# Altium PCB Copy of CANable.PcbDoc
Units mil, origin at the board's own origin, x right, y up, seen from the top; angles counter-clockwise.
Board outline 1380 x 996.39 mil, 2 copper layers (Top Layer, Bottom Layer); 29 components, 20 nets, 127 pads, 14 vias.
Unrouted connection lines stored in the file: 4.
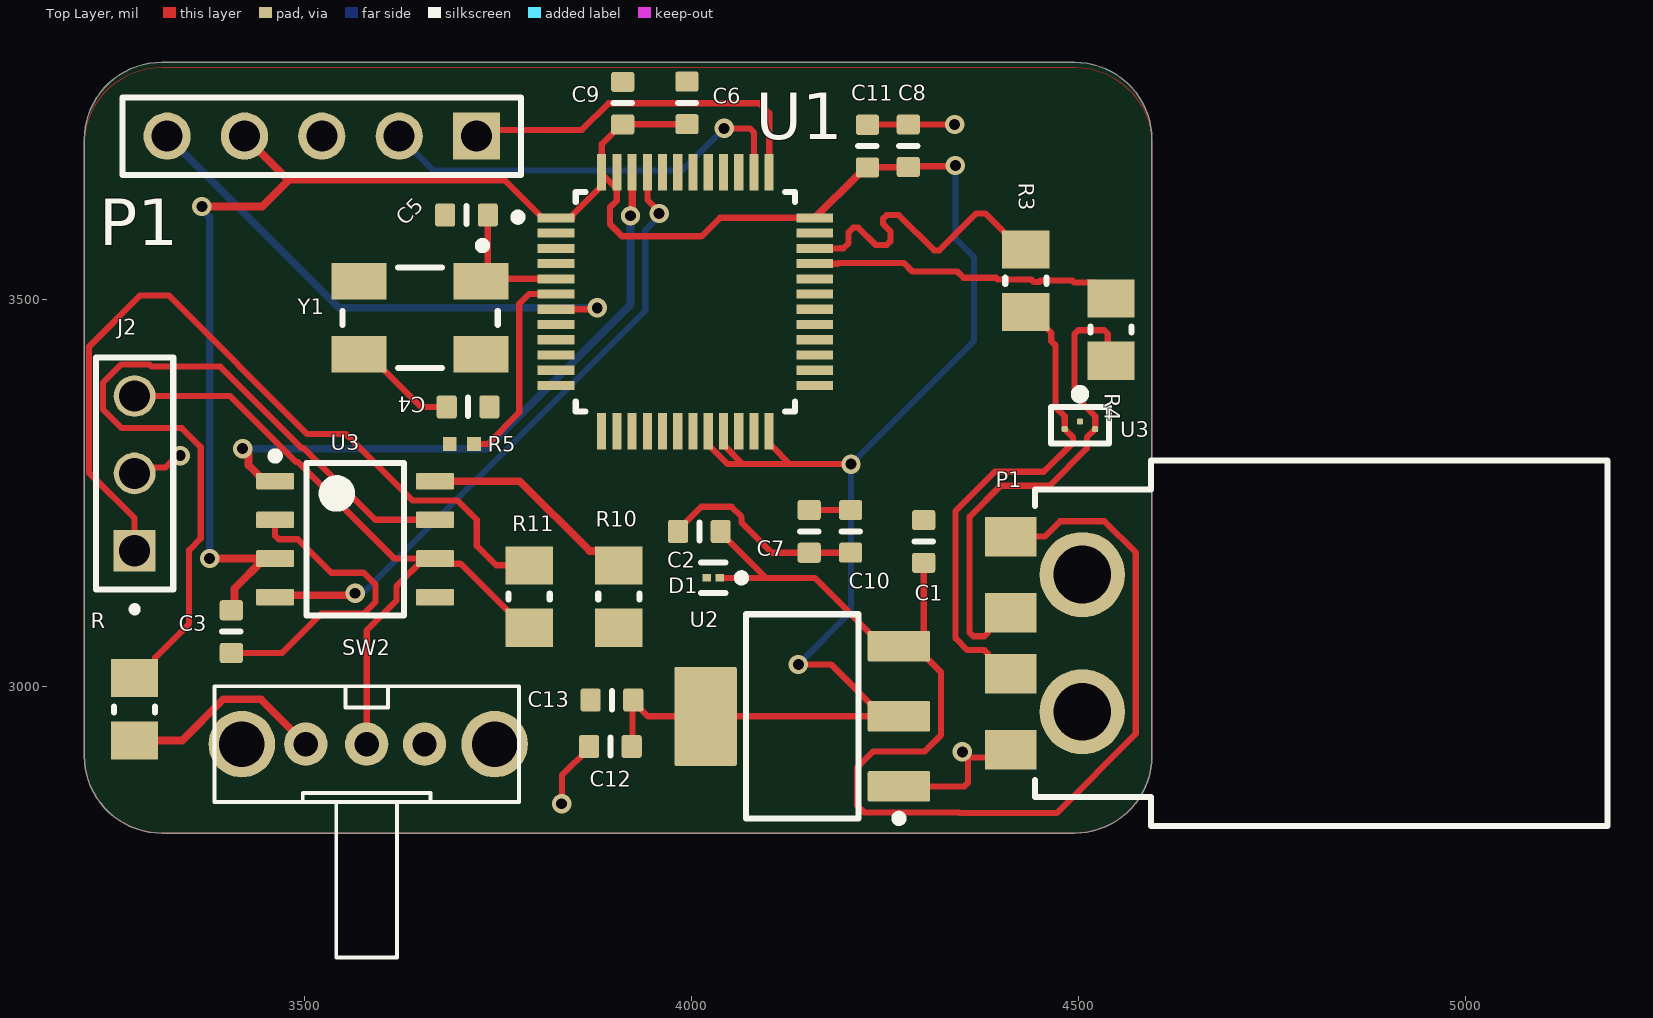
[diagram p0: Top Layer view]
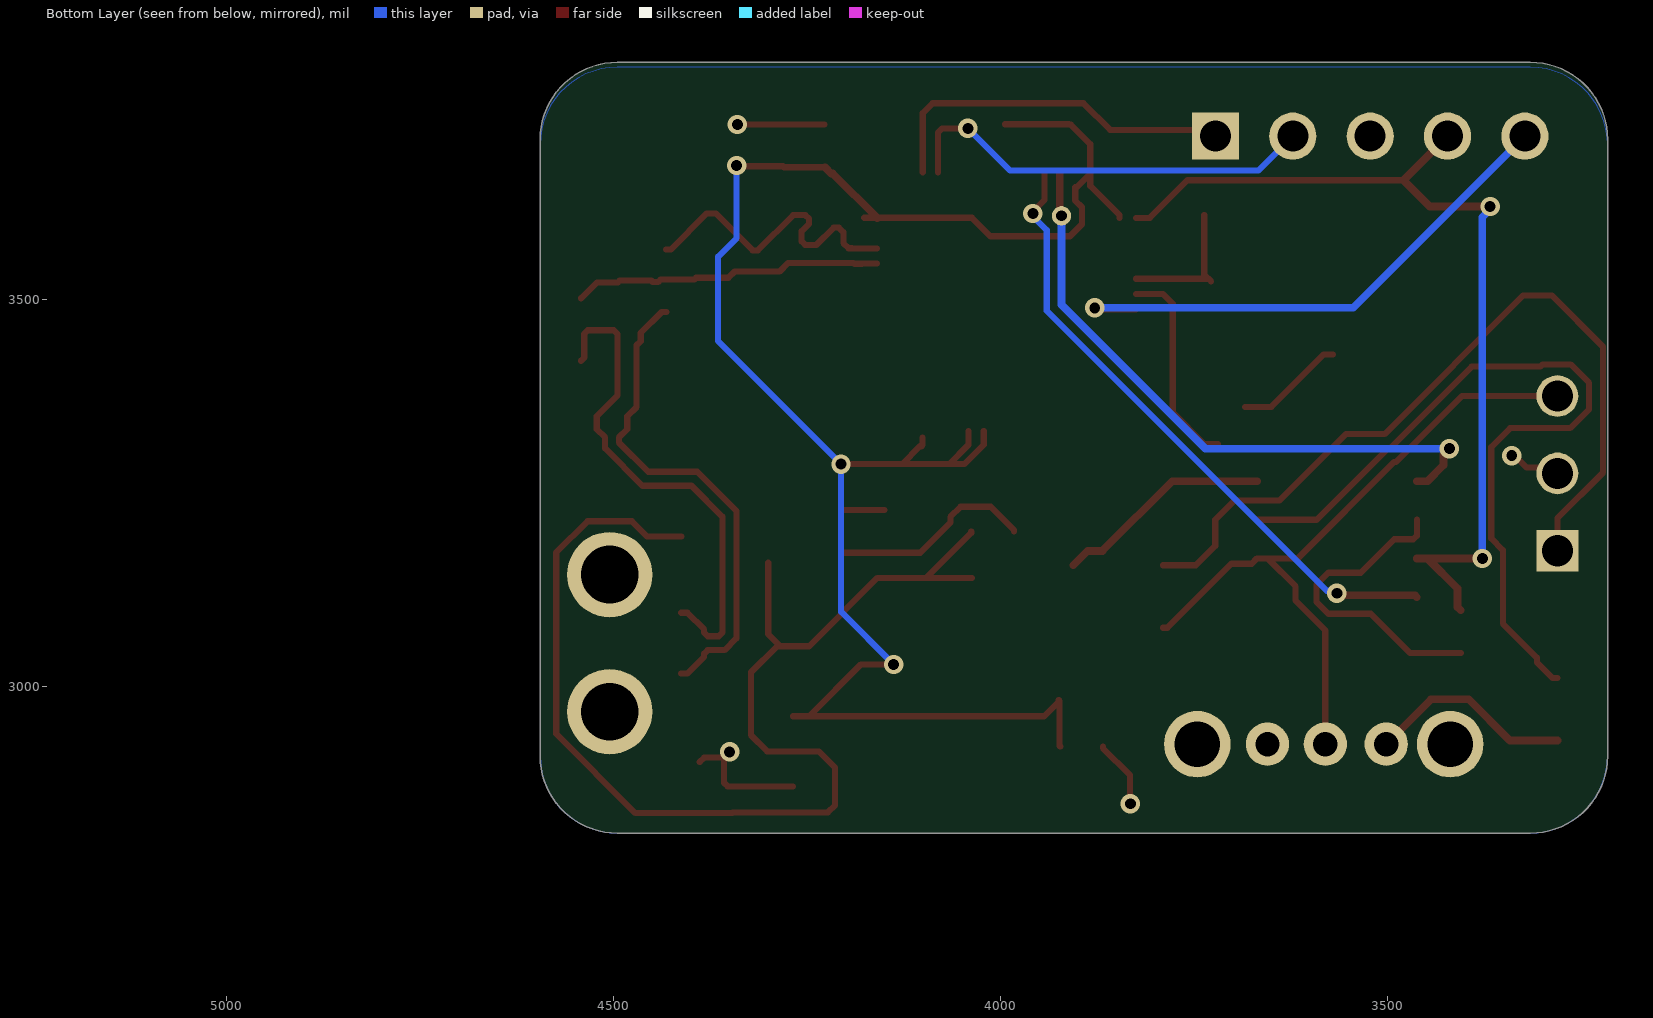
[diagram p1: Bottom Layer view, seen from below]

## Layer stack, top to bottom
Top Solder: solder mask 0.4, Solder Resist, Dk 3.5
Top Layer: signal copper 1.4
Dielectric 1: dielectric 12.6, FR-4, Dk 4.8
Bottom Layer: signal copper 1.4
Bottom Solder: solder mask 0.4, Solder Resist, Dk 3.5

## Board outline
3215,2910 3215,3706.39 cw(c3315,3706.39) 3315,3806.39 4495,3806.39 cw(c4495,3706.39) 4595,3706.39 4595,2910 cw(c4495,2910) 4495,2810 3315,2810 cw(c3315,2910)

## Design rules (kind name [scope] priority, off if disabled: settings)
Clearance [All] p1: gap=10 ignorepadtopadclearanceinfootprint=FALSE
DiffPairsRouting [All] p1: maxlimit=10 minlimit=10 mostfreqgap=10 toplayer_minwidth=8 toplayer_maxwidth=12 toplayer_prefwidth=8 bottomlayer_minwidth=8 bottomlayer_maxwidth=12 bottomlayer_prefwidth=8 maxuncoupledlength=500
HoleSize [All] p1: absolutevalues=TRUE maxlimit=50 minlimit=1 maxpercent=80.000 minpercent=20.000
PolygonConnect [All] p1: connectstyle=Relief reliefconductorwidth=10 reliefentries=4 polygonreliefangle="90 Angle" airgapwidth=10
RoutingVias [All] p1: holewidth=28 width=50 viastyle="Through Hole" minholewidth=28 minwidth=50 maxholewidth=28 maxwidth=50
SolderMaskExpansion [All] p1: expansion=4 istentingtop=FALSE
SupplyNets "Schematic Supply Nets_2" [InNet('VBUS')] p1: voltage=0.000
SupplyNets "Schematic Supply Nets_1" [InNet('+3.3')] p2: voltage=0.000
SupplyNets "Schematic Supply Nets" [InNet('GND')] p3: voltage=0.000
Width [All] p1: maxlimit=10 minlimit=8 preferedwidth=8 minimp=50.000000 maximp=50.000000 favimp=50.000000 checkconnectedcopper=TRUE
28 further rules are at their usual default settings.

## Classes and differential pairs
component class U_Voltage_Regulator: C1 C2 C12 C13 U2
component class U_Microcontroller: C4 C5 C6 C7 C8 C9 C10 C11 R3 R4 R5 U1 Y1
component class U_Input_Output: D1 D2 J2 P1 R11 U3
component class U_CAN_Transceiver: C3 R R10 SW2 U3
differential pair D_USB: +D_USB_P -D_USB_N

## Components (designator, comment, footprint, x,y, rotation, side; value= is the part's Value field where it differs from the comment)
C1 "0.1uF" CAPC0603(1608)100_L 4300,3187 r90 top
C2 "10uF" CAPC0603(1608)100_L 4010,3200 r180 top
C3 "100nF" CAPC0603(1608)100_L 3405,3070.56 r270 top
C4 "22pF" CAPC0603(1608)100_L 3711,3361 r0 top
C5 "22pF" CAPC0603(1608)100_L 3709,3609 r180 top
C6 "100nF" CAPC0603(1608)100_L 3994,3754 r90 top
C7 "100nF" CAPC0603(1608)100_L 4152,3200 r270 top
C8 "100nF" CAPC0603(1608)100_L 4280.09,3698.49 r90 top
C9 "100nF" CAPC0603(1608)100_L 3911,3753.56 r90 top
C10 "100nF" CAPC0603(1608)100_L 4205.58,3200.1 r270 top
C11 "100nF" CAPC0603(1608)100_L 4227.23,3698.09 r90 top
C12 "10uF" CAPC0603(1608)100_L 3895,2922 r180 top
C13 "0.1uF" CAPC0603(1608)100_L 3897,2982 r180 top
D1 "ESD441DPLR" FP-DPL0002A-MFG 4028,3140 r180 top
J2 "CAN" "3 pin 2.54mm header-Footprint-1" 3330,3125 r90 top
P1 "TSW-105-05-L-S" SMTC-TSW-105-05-X-S 3722,3711 r180 top
P1 "629004113921" 629004113921 4814.06,3055.58 r90 top
R "RES 0805" RESC2013X50X30ML20T20 3280,2970 r90 top
R3 "RES 0805" RESC2013X50X30ML20T20 4432,3524 r90 top
R4 "RES 0805" RESC2013X50X30ML20T20 4542,3461 r90 top
R5 "1k" RESC1005X40X25LL05T05 3703,3313 r180 top
R10 "RES 0805" RESC2013X50X30ML20T20 3905.85,3115.87 r270 top
R11 "RES 0805" RESC2013X50X30ML20T20 3790,3115.87 r90 top
SW2 "OS102011MA1Q" OS102011MA1Q 3580,2925 r0 top
U1 "STM32G431CBT6" FP-LQFP48-5B-MFG 3992,3497 r0 top
U2 "REG1117-3.3" DCY0004A_M 4143,2961 r180 top
U3 "ESD122DMYR" FP-DMY0003A-MFG 4502,3337.08 r270 top
U3 "SN65HVD231QDG4" D0008A_L 3565,3190 r0 top
Y1 "ABM3B-8.000MHZ-B2-T" FP-ABM3B-MFG 3649,3476 r180 top

## Footprints (in the part's own frame and the unit in brackets; to place one, negate y for a bottom-side part, rotate by r counter-clockwise, add the part's x,y. Pads: shape width x height; smd on the part's side, far side on the other; paste and mask are expansions set on the pad)
"3 pin 2.54mm header-Footprint-1" [mm]
  rect 1.37x1.37 hole 1.02: 1(1.27,1.27)
  round 1.37 hole 1.02: 2(3.81,1.27) 3(6.35,1.27)
  silkscreen extent -0.75,0 7.62,2.54
629004113921 [mm] "USB 2.0 Plug Type A SMT with Clip"
  rect 1.3x1.7 smd: 1(3.5,10.2) 2(1,10.2) 3(-1,10.2) 4(-3.5,10.2)
  round 2.8 hole 1.9: Shell(-2.25,7.85) Shell(2.25,7.85)
  silkscreen extent -6,-9.4 6,9.4, body extent -6,-9.4 6,10.4, height 2.25
CAPC0603(1608)100_L [mm] "Chip Capacitor, Body 1.6x0.8mm, Height 1.0mm, IPC High Density"
  rrect25% 0.66x0.76 smd: 1(-0.7,0) 2(0.7,0)
  silkscreen extent 0,-0.3 0,0.3, body extent -0.8,-0.4 0.8,0.4, height 0.95
D0008A_L [mm] "SOIC, 8-Leads, Body 5x4mm, Pitch 1.27mm, IPC High Density"
  rrect18% 1.25x0.55 smd: 1(-2.625,1.905) 2(-2.625,0.635) 3(-2.625,-0.635) 4(-2.625,-1.905) 5(2.625,-1.905) 6(2.625,-0.635) 7(2.625,0.635) 8(2.625,1.905)
  silkscreen extent -2.75,-2.5 1.6,2.85, body extent -3,-2.45 3,2.45, height 1.63
DCY0004A_M [mm] "SOT223, 4-Leads, Body 6.7x3.7mm, Pitch 2.3mm, IPC Low Density"
  rrect10% 2.05x1 smd: 1(-3.175,2.3) 2(-3.175,0) 3(-3.175,-2.3)
  rrect5% 2.05x3.25 smd: 4(3.175,0)
  silkscreen extent -3.3,-3.35 1.85,3.47
FP-ABM3B-MFG [mm]
  rect 1.8x1.2 smd paste+0 mask+0: 1(-2,-1.2) 2(2,-1.2) 3(2,1.2) 4(-2,1.2)
  silkscreen extent -2.55,-2.5 2.55,1.65, body extent -3,-1.9 3,1.9, height 0.25
FP-DMY0003A-MFG [mm]
  rrect50% 0.2x0.2 smd paste-1000 mask-1000: 1(-0.125,0) 2(0.125,-0.5) 3(0.125,0.5)
  silkscreen extent -1.17,-0.95 0.6,0.95, body extent -0.45,-0.8 0.45,0.8, height 0.25
FP-DPL0002A-MFG [mm]
  rect 0.28x0.25 smd paste+0 mask+0: 1(-0.22,0) 2(0.22,0)
  silkscreen extent -1.05,-0.5 0.4,0.5, body extent -0.46,-0.28 0.46,0.28, height 0.25
FP-LQFP48-5B-MFG [mm]
  rect 1.2x0.3 smd paste+0 mask+0: 1(-4.25,2.75) 2(-4.25,2.25) 3(-4.25,1.75) 4(-4.25,1.25) 5(-4.25,0.75) 6(-4.25,0.25) 7(-4.25,-0.25) 8(-4.25,-0.75) 9(-4.25,-1.25) 10(-4.25,-1.75) 11(-4.25,-2.25) 12(-4.25,-2.75) 25(4.25,-2.75) 26(4.25,-2.25) 27(4.25,-1.75) 28(4.25,-1.25) 29(4.25,-0.75) 30(4.25,-0.25) 31(4.25,0.25) 32(4.25,0.75) 33(4.25,1.25) 34(4.25,1.75) 35(4.25,2.25) 36(4.25,2.75)
  rect 0.3x1.2 smd paste+0 mask+0: 13(-2.75,-4.25) 14(-2.25,-4.25) 15(-1.75,-4.25) 16(-1.25,-4.25) 17(-0.75,-4.25) 18(-0.25,-4.25) 19(0.25,-4.25) 20(0.75,-4.25) 21(1.25,-4.25) 22(1.75,-4.25) 23(2.25,-4.25) 24(2.75,-4.25) 37(2.75,4.25) 38(2.25,4.25) 39(1.75,4.25) 40(1.25,4.25) 41(0.75,4.25) 42(0.25,4.25) 43(-0.25,4.25) 44(-0.75,4.25) 45(-1.25,4.25) 46(-1.75,4.25) 47(-2.25,4.25) 48(-2.75,4.25)
  silkscreen extent -5.62,-3.6 3.6,3.6, body extent -4.95,-4.95 4.95,4.95, height 0.25
OS102011MA1Q [mil]
  round 56 hole 31.5: 1(-78.74,0) 2(0,0) 3(74.8,0)
  round 86 hole 59.06: MT1(-161.42,0) MT2(165.35,0)
  silkscreen extent -197,-276 197,75, body extent -170,-244 170,86, height 185
RESC1005X40X25LL05T05 [mm] "Chip Resistor, 2-Leads, Body 1.05x0.55mm, IPC High Density"
  rect 0.45x0.45 smd: 1(-0.4,0) 2(0.4,0)
  body extent -0.53,-0.28 0.53,0.28, height 0.4
RESC2013X50X30ML20T20 [mm] "Chip Resistor, 2-Leads, Body 2.00x1.25mm, IPC Low Density"
  rect 1.25x1.55 smd: 1(-1.025,0) 2(1.025,0)
  silkscreen extent -0.1,-0.67 0.1,0.67, body extent -1.1,-0.72 1.1,0.72, height 0.5
SMTC-TSW-105-05-X-S [mm] ".025 SQ Post Terminal Strip Assembly, 1x5 Pins, Vertical, 2.54mm Pitch, Male"
  rect 1.55x1.55 hole 1.02: 1(0,0)
  round 1.55 hole 1.02: 2(2.54,0) 3(5.08,0) 4(7.62,0) 5(10.16,0)
  silkscreen extent -1.46,-1.27 11.62,1.27, body extent -1.27,-1.27 11.43,1.27, height 5.21

## Part data
C1 C2 C4 C5 C6 C7 C8 C9 C10 C11 C12 C13: library part CMP-001-00083-4, "GENERIC CAPACITOR 0805 or 0603(1608)"
C3: library part CMP-001-00083-4
D1: library part CMP-00370-140306675-1, "ESD441DPLR 1-pF, 5.5-V, 30-KV ESD protection device in 0201 package 2-X2SON -40 to 125", Ambient Temperature Range High=150°C, Breakdown Voltage=6V, Capacitance=1pF, Clamping Voltage=3.8V, Manufacturer Lifecycle Status=ACTIVE, Max Operating Temperature=125°C, Min Operating Temperature=-40°C, Peak Pulse Current=6A, Peak Pulse Power=45W, Reverse Standoff Voltage=5.5V, Direction=Unidirectional, Height=320µm, Length=600µm, Lifecycle Status=Production, NexarPartId=140306675, Number of Channels=1, Number of Pins=2, Thickness=300µm, Width=300µm
J2: library part CMP-002-00074-2, "3 pin header for jumpers connectors 2.54mm pitch."
P1: library part CMP-1024-00366-1, "0.025\" SQ Post Header, Through-hole, Vertical, -55 to 125 degC, 2.54 mm Pitch, 5-Pin, Male, RoHS", Manufacturer=Samtec, Temperature Range="-55 to 125 degC", ComponentLink1Description="Manufacturer URL", ComponentLink1URL=http://www.samtec.com, ComponentLink2Description=Datasheet, ComponentLink2URL=http://www.samtec.com/documents/webfiles/pdf/TSW_TH.PDF, ComponentLink3Description="Package Specification", ComponentLink3URL=http://www.samtec.com/documents/webfiles/cpdf/TSW-XXX-XX-XXX-X-XX-XXX-MKT.pdf, DatasheetVersion=F-214, Mounting Technology=Through-hole, Orientation=Vertical, PackageDescription=".025[0.64] SQ. Post Terminal Strip Assembly", PackageReference=TSW-105-05-X-S, PackageVersion="DM, 8/1988", PartNumber=TSW-105-05-L-S, Pitch="2.54 mm", RoHS=True
P1: library part CMP-1502-03242-2, Contact Resistance=20mΩ, Current Rating=1.5A, Insulation Resistance=1GΩ, Max Operating Temperature=105°C, Min Operating Temperature=-40°C, Operating Supply Voltage=30V, Connector Type=USB, Contact Plating=Gold, Features=Shielded, Gender=Male, Lead Free="Lead Free", Length=18.8mm, Mount="Horizontal, Surface Mount", NexarPartId=19991169, Number of Contacts=4, Number of Pins=4, Orientation=Horizontal, REACH SVHC=Unknown, RoHS=Compliant, Termination=SMD/SMT, USB Standard="USB 2.0"
R R3 R4 R10 R11: library part CMP-009-00177-4, "Surface Mount 0805 Resistor"
R5: library part CMP-2000-07451-1, "Chip Resistor, 0 Ohm, 0.1 W, -55 to 155 degC, 0402 (1005 Metric), RoHS, Tape and Reel", Case Code (Imperial)=0402, Case Code (Metric)=1005, Manufacturer=Panasonic, Max Operating Temperature=155degC, Max Power Dissipation=100mW, Min Operating Temperature=-55degC, Package Description="2-Pin Surface Mount Device, Body 1 x 0.5 mm", Package Quantity=1, Package Reference=402, Resistance=0mOhm, Temperature Coefficient=600ppm/��C, Tolerance=5%, Voltage Rating=50V, Case/Package=0402, Composition=ThickFilm, Contact Plating=Tin, Datasheet URL=https://industrial.panasonic.com/cdbs/www-data/pdf/RDA0000/AOA0000C301.pdf, Datasheet Version=03/2015, Depth=0.5mm, Height=0.35mm, Lead Free=LeadFree, Length=1mm, Manufacturer URL=http://www.panasonic.com/, Military Standard=Not, Mount=SurfaceMount, Mounting Technology=SurfaceMount, Number of Terminations=2, Packaging=TapeandReel, Power Rating=100mW, Radiation Hardening=No, REACH SVHC=NoSVHC, RoHSCompliant=True, Termination=SMD/SMT, Voltage Rating (DC)=50V, Width=0.02inch
SW2: library part CMP-011-00009-1, "Slide Switch SPDT Through Hole, Right Angle", Case/Package=None, Check_prices=https://www.snapeda.com/parts/OS102011MA1Q/C%2526K/view-part/?ref=eda, Component Type=Standard, Design Item ID=OS102011MA1Q, MF=C&K, MP=OS102011MA1Q, Pins=5, SnapEDA_Link=https://www.snapeda.com/parts/OS102011MA1Q/C%2526K/view-part/?ref=snap, Source=OS102011MA1Q.SchLib
U1: library part CMP-12105-000030-1, "MAINSTREAM ARM CORTEX-M4+ MCU 17", Ambient Temperature Range High=+85°C, Ambient Temperature Range Low=-40°C, Frequency=170MHz, Manufacturer=STMicroelectronics, Max Junction Temp=+105°C, Max Supply Voltage=3.6V, Min Supply Voltage=1.62V, Package=LQFP48-5B, Temperature="-40°C to +85°C", Automotive=No, Category=IC, ComponentLink2Description=Datasheet, ComponentLink2URL=https://www.st.com/resource/en/datasheet/stm32g431cb.pdf, Core Architecture="Arm Cortex-M4", Data Bus Width=32bits, Device Class L1="Integrated Circuits (ICs)", Device Class L2="Embedded Processors and Controllers", Device Class L3=Microcontrollers, Digikey Description="MAINSTREAM ARM CORTEX-M4+ MCU 17", Height=1.6mm, Interface=I2C,SPI,UART,USART,CAN,USB,LIN,IrDA,I2S, Lead Free=Yes, Manufacturer Part Number=STM32G431CBT6, Memory Size=128KBytes, Memory Type=FLASH, Number of A/D Converters=1, Number of ADC Channels=17, Number Of Cores=1, Number of I2C Channels=3, Number of I/Os=38, Number of PWM Channels=31, Number of SPI Channels=3, Number of Timers/Counters=14, Number of UART Channels=4, Number Of Usb Channels=1, Octopart=https://octopart.com/stm32g431cbt6-stmicroelectronics-98835224, RAM Size=32KBytes, RoHS=TRUE, Standoff Height=0.05mm, Temperature Range High=+85°C, Temperature Range Low=-40°C
U2: library part CMP-019-00049-4, "LDO Regulator Pos 3.3V 0.8A 4-Pin(3+Tab) SOT-223 Rail"
U3: library part CMP-04985-000020-1, "TVS DIODE 3.6V 8.4V 3X2SON", Clamping Voltage=8.4V, Max Operating Temperature=125°C, Min Breakdown Voltage=5.1V, Min Operating Temperature=-40°C, Peak Pulse Current=2.5A, Peak Pulse Power=20W, Power Line Protection=No, Resistor Type=Zener, Reverse Standoff Voltage=3.6V, Interface=USB, Mount="Surface Mount", Number of Bidirectional Channels=2, Number of Channels=2, Number of Pins=3, Packaging="Tape and Reel", RoHS Compliant=Yes
U3: library part CMP-015-00013-2, "3.3-V CAN Transceiver with Sleep Mode 8-SOIC -40 to 125"
Y1: library part CMP-1688-00002-2, "Crystal 8MHz ±20ppm 18pF SMD-4 5mm x 3.2mm", Case/Package=CSMD, ESR (Equivalent Series Resistance)=200R, Frequency=8MHz, Frequency Stability=50ppm, Frequency Tolerance=20ppm, Load Capacitance=18pF, Max Operating Temperature=70°C, Min Operating Temperature=-20°C, Operating Frequency="8 MHz", Package Quantity=1000, Resistor Type=Ceramic, Depth=3.2mm, Height=0.043inch, Lead Free="Lead Free", Length=5mm, Mount="Surface Mount", Number of Pins=4, Packaging="Tape and Reel", Series=ABM3B, Series Resistance=200R, Termination=SMD/SMT, Tolerance=20ppm, Width=0.126inch

## Free pads (board coordinates)
  round 25 hole 14: 2(3921,3608)

## Via types
v1: diameter 25, hole 14, Top Layer to Bottom Layer, 14 vias

## Nets (pads, with @x,y where several pads share a name; then routed paths per layer and width w, separated by ;. In a path a pad name is that pad's centre, name@x,y a point inside that pad or via, vN(x,y) a via of type N, cw(c..) or ccw(c..) an arc to the next point about the centre after c; other vN are vias at no path point)
+3.3: C3.1 C6.1 C7.1 C8.1 C9.1 C10.1 C11.1 C12.1 C13.1 P1.4@3422,3711 U1.1 U1.20 U1.21 U1.24 U1.36 U1.48 U2.2 U2.4 U3.3@3461.65,3165 | length 3685.8
  Top Layer w8: 3478.99,3654.01 3758.21,3654.01 3806.96,3605.27 U1.1 ; U1.1@3846,3605.49 3846,3608.87 3883.73,3646.61 U1.48 ; C12.1 3923.56,2923 3923.56,2981 C13.1 ; C13.1@3924.56,2980.04 3943.6,2961 U2.4 U2.2@4247.33,2961 ; C6.1 3993.78,3726.22 3911.22,3726.22 C9.1 3909.04,3726 3883.73,3700.69 U1.48 ; U1.20 4021.53,3311.96 4046.49,3287 4066.17,3287 ; U1.21 4041.21,3311.96 4066.17,3287 ; U1.24@4100.49,3321 4100.49,3311.74 4102.17,3310.06 4103.94,3310.06 4127,3287 ; v1(4138,3028) 4180.33,3028 U2.2@4247.33,2961 ; C7.1@4150.04,3227.56 C7.1 C7.1 4205.53,3227.61 C10.1 ; U1.36@4176,3605.49 4036.86,3605.49 4012.87,3581.5 3910.02,3581.5 3894.5,3597.02 3894.5,3618.98 3903.2,3627.67 3903.2,3644.86 3901.22,3644.86 3883.73,3662.35 U1.48 ; v1(4206,3287) 4127,3287 ; C11.1@4226.71,3670.73 4279.89,3670.73 4281.13,3671.96 4339.96,3671.96 v1(4341,3673) ; U2.2 U2.2@4247.33,2961 ; 4066.17,3287 4127,3287
  Top Layer w10: v1(3367,3620) 3444.97,3620 3478.99,3654.01 P1.4@3422,3711 ; v1(3377,3165) U3.3@3447.87,3165 ; C3.1 3408.99,3102.11 3408.99,3126.12 U3.3@3447.87,3165 ; U3.3@3461.65,3165 U3.3@3447.87,3165 ; U1.36 4216.59,3662.53 4218.51,3662.53 C11.1@4226.71,3670.73
  Bottom Layer w8: v1(4138,3028) 4206,3096 v1(4206,3287) 4365,3446 4365,3555.19 4341,3579.19 v1(4341,3673)
  Bottom Layer w10: v1(3367,3620) 3367,3615.94 3377,3605.94 v1(3377,3165)
CAN_H: R.2 U3.7 | length 1040.7
  Top Layer w8: R.2 3285.91,3010.35 3306.51,3030.96 3306.51,3036.87 3350.5,3080.85 3350.5,3175.98 3365.5,3190.98 3365.5,3308.98 3340.97,3333.5 3263.56,3333.5 3239.03,3358.03 3239.03,3391.97 3263.03,3415.97 3299.03,3415.97 3302,3413 3390.8,3413 3495.97,3307.83 3498.37,3307.83 3591.2,3215 U3.7
CAN_L: J2.3 R11.1 SW2.2 U3.6 | length 904.9
  Top Layer w8: J2.3 3403.34,3375 3488.52,3289.83 3490.92,3289.83 3615.74,3165 U3.6@3654.57,3165 ; SW2.2 3580,3072.07 3618.46,3110.53 3618.46,3128.9 U3.6@3654.57,3165 ; R11.1 3784.09,3075.51 3701.43,3158.17 3675.17,3158.17 U3.6 U3.6@3654.57,3165
CANH: J2.1 R11.2 | length 1049
  Top Layer w8: J2.1 3280,3217.06 3221.03,3276.03 3221.03,3439.03 3287,3505 3324.26,3505 3503.43,3325.83 3553.43,3325.83 3639.08,3240.17 3697.26,3240.17 3722.38,3215.06 3722.38,3181.33 3747.49,3156.22 R11.2
D_USB_N: P1.2@4412.48,3094.95 R4.1 U3.3@4521.69,3332.16 | length 654.8
  Top Layer w8: P1.2@4412.48,3094.95 4404.61,3094.95 4383.02,3073.36 4383.02,3069.27 4378.33,3064.58 4364,3064.58 4359.31,3069.27 4359.31,3219.06 4399.29,3259.05 4462.66,3259.05 4511,3307.39 4511,3321.47 4521.69,3332.16 4521.69,3348.83 4495,3375.52 4495,3455.31 4499.69,3460 4533.31,3460 4538,3455.31 4538,3424.65 R4.1
D_USB_P: P1.3@4412.48,3016.21 R3.1 U3.2@4482.31,3332.16 | length 643
  Top Layer w8: P1.3@4412.48,3016.21 4404.61,3016.21 4383.02,3037.8 4383.02,3041.9 4378.33,3046.58 4356.54,3046.58 4341.31,3061.81 4341.31,3226.52 4391.84,3277.05 4455.2,3277.05 4493,3314.84 4493,3321.47 4482.31,3332.16 4482.31,3348.83 4470.38,3360.77 4470.38,3394.72 4470.38,3440.56 4465,3445.94 4465,3456.55 4437.91,3483.65 R3.1
GND: C1.2 C2.2 C3.2 C4.2 C5.2 C6.2 C7.2 C8.2 C9.2 C10.2 C11.2 C12.2 C13.2 D1.2 J2.2 P1.3@3522,3711 P1.4@4412.48,2917.79 P1.Shell R10.2 U1.19 U1.23 U1.35 U1.47 U2.1 U3.1@4502,3342 U3.2@3461.65,3215 Y1.2 Y1.4 | length 1117
  Top Layer w8: J2.2 3287.57,3282.57 3319.78,3282.57 3335.21,3298 v1(3339,3298) ; C3.2 3470.72,3043 3521.22,3093.5 3575.98,3093.5 3591.5,3109.02 3591.5,3130.98 3575.98,3146.5 3534.24,3146.5 3490.92,3189.83 3466.34,3189.83 3461.65,3194.51 U3.2@3461.65,3215 ; v1(3832,2848) 3832.4,2848.4 3832.4,2885 3867.44,2920.04 C12.2 ; C2.2 3982.44,3201.96 4012.48,3232 4051.41,3232 4064.56,3218.86 4064.56,3211.43 4103.55,3172.44 C7.2 4152.05,3172.49 4205.53,3172.49 C10.2 ; C11.2@4227.43,3725.85 4279.89,3725.85 C8.2 ; U2.1 4352.58,2870.45 4357.27,2875.14 v1@4357.27,2907.73 ; C8.2 v1(4340,3726) ; v1(4350,2915) v1@4357.27,2907.73 ; P1.4@4388.7,2901.88 4388.7,2902.05 4383.02,2907.73 v1@4357.27,2907.73
NetC4_1: C4.1 R5.2 Y1.3 | length 141.2
  Top Layer w8: Y1.3 3582.07,3428.76 3649.83,3361 C4.1
NetC5_1: C5.1 U1.5 Y1.1 | length 187.7
  Top Layer w8: C5.1 3736.56,3532.06 Y1.1 3731.02,3526.53 U1.5
NetR3_2: R3.2 U1.34 | length 406.3
  Top Layer w8: U1.34 4192.05,3565.9 4192.16,3566 4196.31,3566 4203,3572.69 4203,3587 4208.69,3592.69 4215.31,3592.69 4237.69,3570.31 4252.31,3570.31 4257,3575 4257,3588 4247.31,3597.69 4247.31,3604.31 4252,3609 4268,3609 4313.69,3563.31 4320.31,3563.31 4368,3611 4379.45,3611 4426.09,3564.35 R3.2
NetR4_2: R4.2 U1.33 | length 403.8
  Top Layer w8: U1.33 4178.72,3546.21 4178.94,3545.99 4188.74,3545.99 4189.81,3547.06 4274.41,3547.06 4285.46,3536 4343.54,3536 4351.54,3528 4393.44,3528 4395.69,3525.75 4438.96,3525.75 4442.46,3522.25 4449.31,3522.25 4451.27,3524.21 4492.33,3524.21 4494.58,3521.96 4521.39,3521.96 R4.2
NetR5_1: R5.1 U1.6 | length 268.6
  Top Layer w8: R5.1 3736.41,3313 3777.17,3353.76 3777.17,3494.33 3789.69,3506.84 U1.6
NetR10_1: R10.1 U3.8 | length 282.6
  Top Layer w10: U3.8 3778,3265 3868.15,3174.85 3887.21,3174.85 R10.1
NetR_1: R.1 SW2.1 | length 267.4
  Top Layer w10: R.1 3341.2,2929.65 3394.56,2983 3443.26,2983 SW2.1
NetU1_45: U1.45 U3.4 | length 824.5
  Top Layer w8: U1.45 3942.79,3628.7 3958,3613.49 v1(3958,3611)
  Top Layer w10: U3.4 3464.15,3117.5 3562.5,3117.5 v1(3565,3120)
  Bottom Layer w8: v1(3565,3120) 3568.25,3123.25 3578.01,3123.25 3940,3485.24 3940,3589.52 3958,3607.52 v1(3958,3611)
NetU1_46: pad.2 U1.46 U3.1@3461.65,3265 | length 818
  Top Layer w10: v1(3419.65,3307) 3427.31,3299.35 3427.31,3285.57 3447.87,3265 U3.1@3461.65,3265 ; pad.2 3923.1,3610.1 U1.46
  Bottom Layer w10: v1(3419.65,3307) 3734.89,3307 3921,3493.11 pad.2
RESET: P1.5 U1.7 | length 702
  Top Layer w8: U1.7 3876.16,3487.16 v1(3878,3489)
  Bottom Layer w10: P1.5 3544,3489 v1(3878,3489)
SWCLK: P1.2@3622,3711 U1.38 | length 553.2
  Top Layer w8: v1(4042,3721) 4075.31,3721 4080.58,3715.73 U1.38
  Bottom Layer w8: P1.2@3622,3711 3666.51,3666.49 3987.49,3666.49 v1(4042,3721)
SWDIO: P1.1@3722,3711 U1.37 | length 474.2
  Top Layer w8: P1.1@3722,3719 3858.14,3719 3892.58,3753.44 4087.56,3753.44 4100.27,3740.73 U1.37
VBUS: C1.1 C2.1 D1.1 P1.1@4412.48,3193.38 U2.3 | length 1618.8
  Top Layer w8: D1.1 4095.6,3140 ; C2.1 4037.56,3198.04 4095.6,3140 ; C1.1 4300,3067.24 U2.3@4284.31,3051.55 ; P1.1@4412.48,3193.38 4456.47,3193.38 4476.37,3213.28 4533.63,3213.28 4574.12,3172.8 4574.12,2938.37 4471.75,2836 4346.69,2836 4345.92,2836.76 4223,2836.76 4213.65,2846.12 4213.65,2894.78 4234.59,2915.72 4301.41,2915.72 4322.35,2936.67 4322.35,3017.87 4288.67,3051.55 U2.3@4284.31,3051.55 ; 4095.6,3140 4097.77,3140 4158.88,3140 4247.33,3051.55 U2.3 U2.3@4284.31,3051.55
pads on no net: SW2.3 SW2.MT1 SW2.MT2 U1.2 U1.3 U1.4 U1.8 U1.9 U1.10 U1.11 U1.12 U1.13 U1.14 U1.15 U1.16 U1.17 U1.18 U1.22 U1.25 U1.26 U1.27 U1.28 U1.29 U1.30 U1.31 U1.32 U1.39 U1.40 U1.41 U1.42 U1.43 U1.44 U3.5

## Polygon pours and split planes (outlines as drawn)
GND on Bottom Layer "Ground Pour 2" (solid, shelved, pour order 5): 3215,2910 3215,3700 cw(c3315,3700) 3315,3800 4495,3800 cw(c4495,3700) 4595,3700 4595,2910 cw(c4495,2910) 4495,2810 3315,2810 cw(c3315,2910)
GND on Top Layer "Ground Pour" (solid, shelved, pour order 4): 3215,2910 3215,3700 cw(c3315,3700) 3315,3800 4495,3800 cw(c4495,3700) 4595,3700 4595,2910 cw(c4495,2910) 4495,2810 3315,2810 cw(c3315,2910)

## Silkscreen, mask and mechanical layers (free items; w line width, h text height)
Mechanical 1:
  the board outline again, w10

## Text inside footprints (layer, text, board x,y; h text height)
P1: Top 3D Body "PCB Edge" at 4634.92,2976.84 h20 r90